# EAGLE board BMS Adapter Segment rev1 (EAGLE 8.1.0)
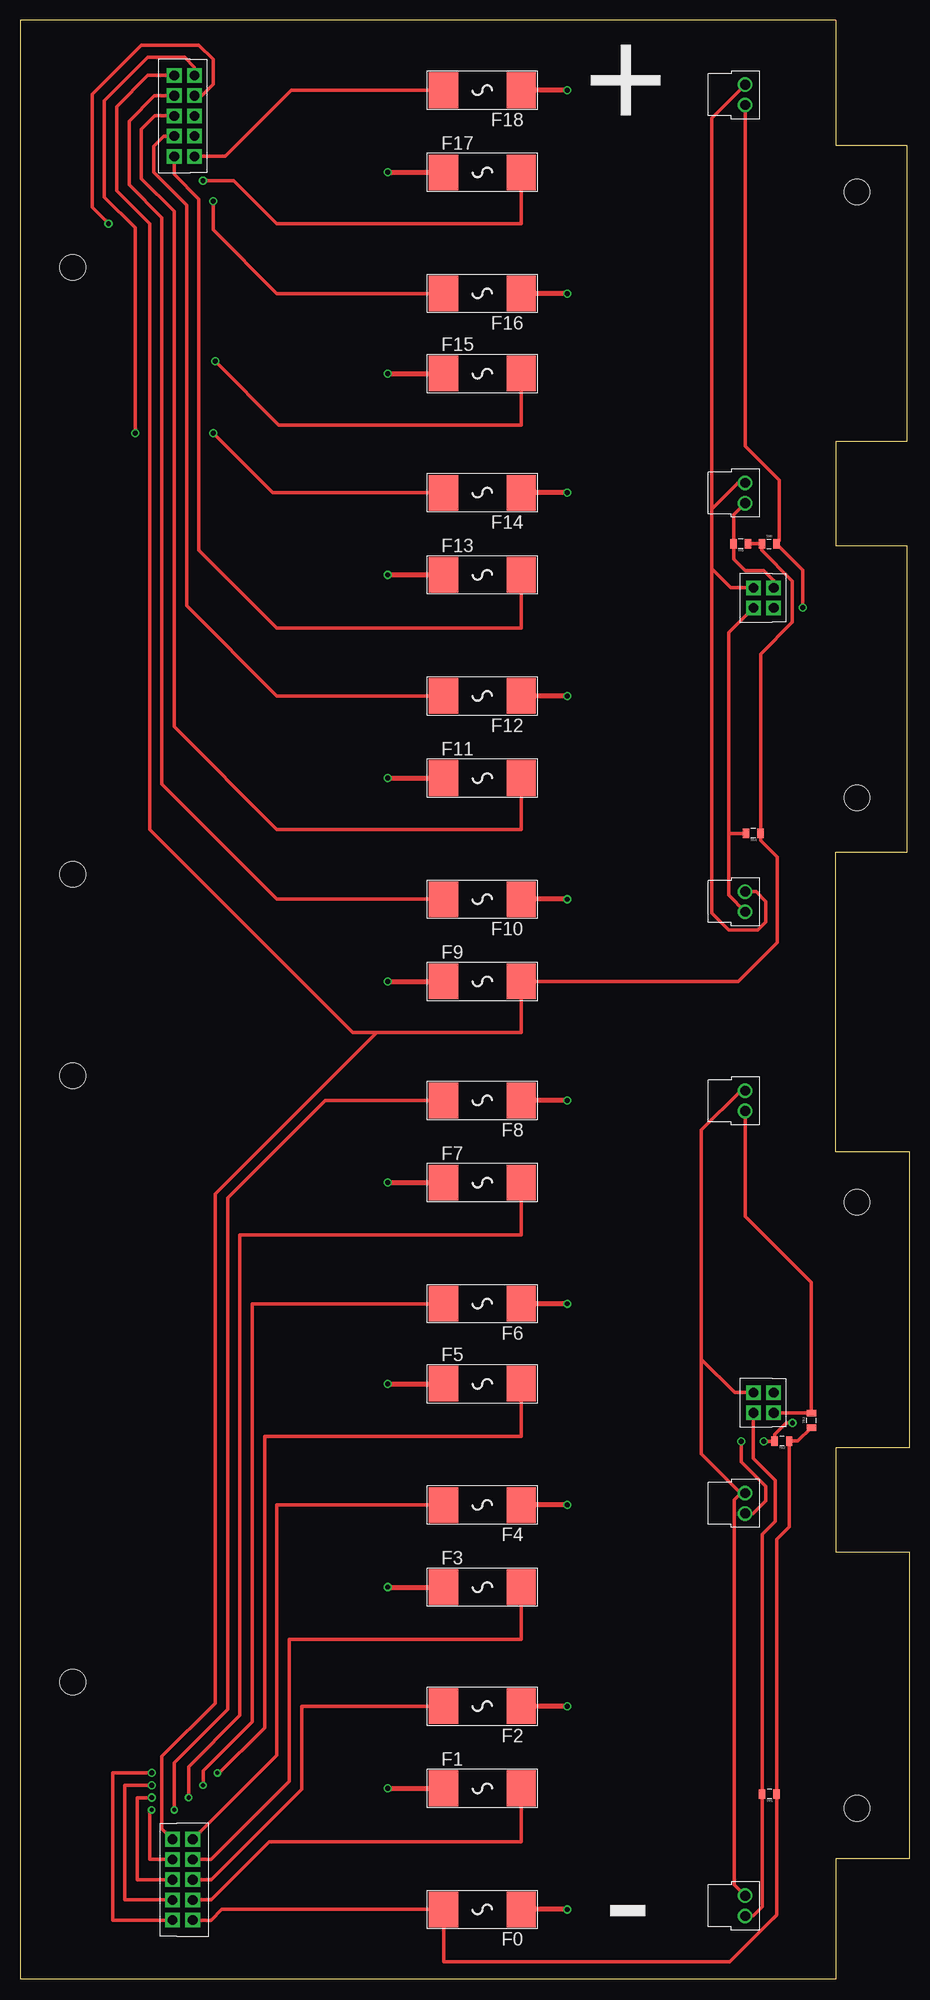
[diagram p0: board, top side]
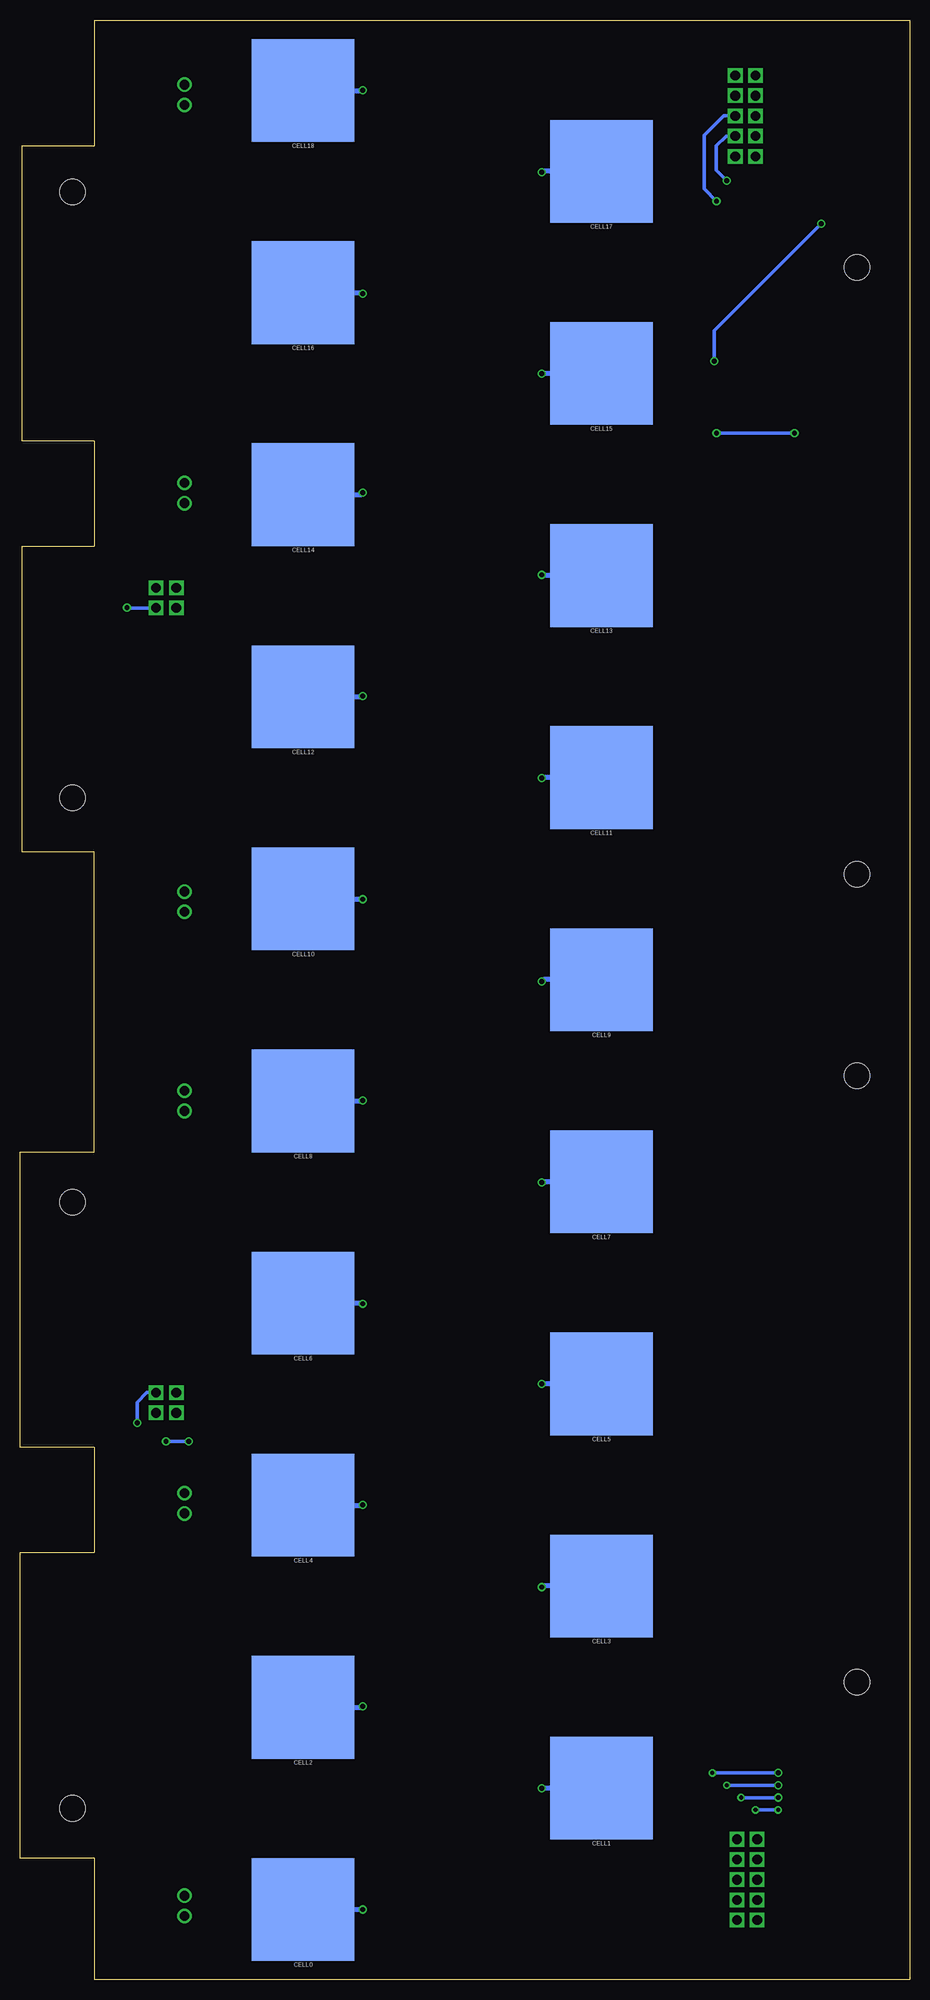
[diagram p1: board, bottom side, seen from below]

Size 109.98 x 242.34 mm. Coordinates in mm from the lower left corner, seen from the top.
Outline: 0,242.34 0,0 100.84,0 100.84,14.99 109.98,14.99 109.98,52.83 100.84,52.83 100.84,65.79 109.98,65.79 109.98,102.36 100.84,102.36 100.84,139.45 109.73,139.45 109.73,177.29 100.84,177.29 100.84,190.25 109.73,190.25 109.73,226.82 100.84,226.82 100.84,242.34 0,242.34
Copper layers (1*16): Top 0.035mm / dielectric 1.5mm / Bottom 0.035mm
Design rules "default": minimum track width 10mil, minimum drill 24mil, track to track 8mil, track to pad 8mil, pad to pad 8mil, via to via 8mil, smd to smd 8mil, copper to edge 40mil, drill to drill 8mil, minimum pad ring 10mil, minimum via ring 8mil, stop-mask expansion 4mil, vias tented up to drill 0mil, thermal gap 10mil
Holes 3.2 mm at 6.5,36.77 6.5,111.77 103.5,96.14 103.5,21.14 6.5,136.71 6.49,211.77 103.5,146.14 103.5,221.11

## Footprints (pad centres in the part's own frame; a part is rotated, then mirrored left to right if it is on the bottom)
KEYSTONE5222 = smd 12.7 x 12.7: P$1 0,0
OMF_250 = smd 3.6 x 4.4: P$1 -4.8,0; P$2 4.8,0
0805 = smd 0.8 x 1.2: 1 -0.9,0; 2 0.9,0
NANO-FIT_VERTICAL-10 = drill 1.2 square: P$1 -5,0; P$2 -2.5,0; P$3 0,0; P$4 2.5,0; P$5 5,0; P$6 -5,2.5; P$7 -2.5,2.5; P$8 0,2.5; P$9 2.5,2.5; P$10 5,2.5
NANO-FIT_VERTICAL-4 = drill 1.2 square: P$1 -1.25,0; P$2 1.25,0; P$3 -1.25,2.5; P$4 1.25,2.5
NANO-FIT_VERTICAL-2 = drill 1.2: P$1 -1.25,0; P$2 1.25,0

## Placement (x,y rotation side)
CELL0  [KEYSTONE5222]  75,8.64 0 bottom
CELL1  [KEYSTONE5222]  38.1,23.65 0 bottom
CELL2  [KEYSTONE5222]  75,33.64 0 bottom
CELL3  [KEYSTONE5222]  38.1,48.65 0 bottom
CELL4  [KEYSTONE5222]  75,58.64 0 bottom
CELL5  [KEYSTONE5222]  38.1,73.65 0 bottom
CELL6  [KEYSTONE5222]  75,83.64 0 bottom
CELL7  [KEYSTONE5222]  38.1,98.65 0 bottom
CELL8  [KEYSTONE5222]  75,108.64 0 bottom
CELL9  [KEYSTONE5222]  38.1,123.65 0 bottom
CELL10  [KEYSTONE5222]  75,133.64 0 bottom
CELL11  [KEYSTONE5222]  38.1,148.65 0 bottom
CELL12  [KEYSTONE5222]  75,158.64 0 bottom
CELL13  [KEYSTONE5222]  38.1,173.65 0 bottom
CELL14  [KEYSTONE5222]  75,183.64 0 bottom
CELL15  [KEYSTONE5222]  38.1,198.65 0 bottom
CELL16  [KEYSTONE5222]  75,208.64 0 bottom
CELL17  [KEYSTONE5222]  38.1,223.65 0 bottom
CELL18  [KEYSTONE5222]  75,233.64 0 bottom
F0  [OMF_250]  57.15,8.64 180 top
F1  [OMF_250]  57.15,23.62 0 top
F2  [OMF_250]  57.15,33.78 180 top
F3  [OMF_250]  57.15,48.51 0 top
F4  [OMF_250]  57.15,58.67 180 top
F5  [OMF_250]  57.15,73.66 0 top
F6  [OMF_250]  57.15,83.57 180 top
F7  [OMF_250]  57.15,98.55 0 top
F8  [OMF_250]  57.15,108.71 180 top
F9  [OMF_250]  57.15,123.44 0 top
F10  [OMF_250]  57.15,133.6 180 top
F11  [OMF_250]  57.15,148.59 0 top
F12  [OMF_250]  57.15,158.75 180 top
F13  [OMF_250]  57.15,173.74 0 top
F14  [OMF_250]  57.15,183.9 180 top
F15  [OMF_250]  57.15,198.63 0 top
F16  [OMF_250]  57.15,208.53 180 top
F17  [OMF_250]  57.15,223.52 0 top
F18  [OMF_250]  57.15,233.68 180 top
TR1  10kΩ  [0805]  92.66,22.91 180 top
TR2  10kΩ  [0805]  94.21,66.57 180 top
TR3  10kΩ  [0805]  97.84,69.14 90 top
TR4  10kΩ  [0805]  90.65,141.76 180 top
TR5  10kΩ  [0805]  89.13,177.57 180 top
TR6  10kΩ  [0805]  92.61,177.57 0 top
X1  CONNECTOR-10NANO-FIT_VERTICAL-10  [NANO-FIT_VERTICAL-10]  19.05,230.5 270 top
X5  CONNECTOR-4NANO-FIT-VERTICAL-4  [NANO-FIT_VERTICAL-4]  90.68,170.89 270 top
X6  CONNECTOR-4NANO-FIT-VERTICAL-4  [NANO-FIT_VERTICAL-4]  90.68,71.32 270 top
X7  CONNECTOR-2NANO-FIT_VERTICAL-2  [NANO-FIT_VERTICAL-2]  89.66,9.09 270 top
X8  CONNECTOR-2NANO-FIT_VERTICAL-2  [NANO-FIT_VERTICAL-2]  89.66,58.88 270 top
X9  CONNECTOR-2NANO-FIT_VERTICAL-2  [NANO-FIT_VERTICAL-2]  89.66,108.66 270 top
X10  CONNECTOR-2NANO-FIT_VERTICAL-2  [NANO-FIT_VERTICAL-2]  89.66,133.3 270 top
X11  CONNECTOR-2NANO-FIT_VERTICAL-2  [NANO-FIT_VERTICAL-2]  89.66,183.85 270 top
X12  CONNECTOR-2NANO-FIT_VERTICAL-2  [NANO-FIT_VERTICAL-2]  89.66,233.12 270 top
X13  CONNECTOR-10NANO-FIT_VERTICAL-10  [NANO-FIT_VERTICAL-10]  21.34,12.32 90 top

## Library data of the parts
CELL0 CELL1-CELL18 F0 F1-F18 TR1-TR6 X1 X5-X13 = HyTechDevices

## Nets
CC0: CELL0.P$1 F0.P$1
CC1: CELL1.P$1 F1.P$1
CC2: CELL2.P$1 F2.P$1
CC3: CELL3.P$1 F3.P$1
CC4: CELL4.P$1 F4.P$1
CC5: CELL5.P$1 F5.P$1
CC6: CELL6.P$1 F6.P$1
CC7: CELL7.P$1 F7.P$1
CC8: CELL8.P$1 F8.P$1
CC9: CELL9.P$1 F9.P$1
CC10: CELL10.P$1 F10.P$1
CC11: CELL11.P$1 F11.P$1
CC12: CELL12.P$1 F12.P$1
CC13: CELL13.P$1 F13.P$1
CC14: CELL14.P$1 F14.P$1
CC15: CELL15.P$1 F15.P$1
CC16: CELL16.P$1 F16.P$1
CC17: CELL17.P$1 F17.P$1
CC18: CELL18.P$1 F18.P$1
SENSE0: F0.P$2 TR1.1 TR2.1 TR3.1 X13.P$1
SENSE1: F1.P$2 X13.P$2
SENSE2: F2.P$2 X13.P$3
SENSE3: F3.P$2 X13.P$4
SENSE4: F4.P$2 X13.P$5
SENSE5: F5.P$2 X13.P$6
SENSE6: F6.P$2 X13.P$7
SENSE7: F7.P$2 X13.P$8
SENSE8: F8.P$2 X13.P$9
SENSE9: F9.P$2 TR4.1 TR5.1 TR6.1 X1.P$1 X13.P$10
SENSE10: F10.P$2 X1.P$2
SENSE11: F11.P$2 X1.P$3
SENSE12: F12.P$2 X1.P$4
SENSE13: F13.P$2 X1.P$5
SENSE14: F14.P$2 X1.P$6
SENSE15: F15.P$2 X1.P$7
SENSE16: F16.P$2 X1.P$8
SENSE17: F17.P$2 X1.P$9
SENSE18: F18.P$2 X1.P$10
THERM1: TR1.2 X6.P$2 X7.P$2
THERM2: TR2.2 X6.P$3 X8.P$2
THERM3: TR3.2 X6.P$4 X9.P$2
THERM4: TR4.2 X5.P$2 X10.P$2
THERM5: TR5.2 X5.P$3 X11.P$2
THERM6: TR6.2 X5.P$4 X12.P$2
THERM_POWER_1: X6.P$1 X7.P$1 X8.P$1 X9.P$1
THERM_POWER_2: X5.P$1 X10.P$1 X11.P$1 X12.P$1

## Tracks (layer width: path | path; a pad name or v marks a point on that pad's centre or on a via)
CC0  (via drill 0.6)
  Top 0.61: v67.64,8.64 F0.P$1
  Bottom 0.61: CELL0.P$1 v67.65,8.64 v67.64,8.64
CC1  (via drill 0.6)
  Top 0.61: v45.47,23.62 F1.P$1
  Bottom 0.61: CELL1.P$1 45.44,23.65 v45.47,23.62
CC2  (via drill 0.6)
  Top 0.61: v67.64,33.78 F2.P$1
  Bottom 0.61: CELL2.P$1 67.78,33.64 v67.64,33.78
CC3  (via drill 0.6)
  Top 0.61: v45.47,48.51 F3.P$1
  Bottom 0.61: CELL3.P$1 45.33,48.65 v45.47,48.51
CC4  (via drill 0.6)
  Top 0.61: v67.64,58.67 F4.P$1
  Bottom 0.61: CELL4.P$1 67.67,58.64 v67.64,58.67
CC5  (via drill 0.6)
  Top 0.61: v45.47,73.66 F5.P$1
  Bottom 0.61: CELL5.P$1 45.45,73.65 v45.47,73.66
CC6  (via drill 0.6)
  Top 0.61: v67.64,83.57 F6.P$1
  Bottom 0.61: CELL6.P$1 67.72,83.64 v67.64,83.57
CC7  (via drill 0.6)
  Top 0.61: v45.47,98.55 F7.P$1
  Bottom 0.61: CELL7.P$1 45.37,98.65 v45.47,98.55
CC8  (via drill 0.6)
  Top 0.61: v67.64,108.71 F8.P$1
  Bottom 0.61: CELL8.P$1 67.71,108.64 v67.64,108.71
CC9  (via drill 0.6)
  Top 0.61: v45.47,123.44 F9.P$1
  Bottom 0.61: CELL9.P$1 45.26,123.65 v45.47,123.44
CC10  (via drill 0.6)
  Top 0.61: v67.64,133.6 F10.P$1
  Bottom 0.61: CELL10.P$1 67.68,133.64 v67.64,133.6
CC11  (via drill 0.6)
  Top 0.61: v45.47,148.59 F11.P$1
  Bottom 0.61: CELL11.P$1 45.41,148.65 v45.47,148.59
CC12  (via drill 0.6)
  Top 0.61: v67.64,158.75 F12.P$1
  Bottom 0.61: CELL12.P$1 67.75,158.64 v67.64,158.75
CC13  (via drill 0.6)
  Top 0.61: v45.47,173.74 F13.P$1
  Bottom 0.61: CELL13.P$1 45.38,173.65 v45.47,173.74
CC14  (via drill 0.6)
  Top 0.61: v67.64,183.9 F14.P$1
  Bottom 0.61: CELL14.P$1 67.89,183.64 v67.64,183.9
CC15  (via drill 0.6)
  Top 0.61: v45.47,198.63 F15.P$1
  Bottom 0.61: CELL15.P$1 45.45,198.65 v45.47,198.63
CC16  (via drill 0.6)
  Top 0.61: v67.64,208.53 F16.P$1
  Bottom 0.61: CELL16.P$1 67.75,208.64 v67.64,208.53
CC17  (via drill 0.6)
  Top 0.61: v45.47,223.52 F17.P$1
  Bottom 0.61: CELL17.P$1 45.34,223.65 v45.47,223.52
CC18  (via drill 0.6)
  Top 0.61: v67.64,233.68 F18.P$1
  Bottom 0.61: CELL18.P$1 67.68,233.64 v67.64,233.68
SENSE0
  Top 0.406: X13.P$1 23.62,7.32 24.94,8.64 F0.P$2 52.35,2.16 87.76,2.16 92.58,6.99 | 92.58,6.99 93.47,7.87 | TR3.1 96.17,66.57 TR2.1 95.11,55.99 93.56,54.44 TR1.1 93.56,7.96 92.58,6.99
SENSE1
  Top 0.406: X13.P$2 23.62,9.82 30.82,17.02 61.95,17.02 F1.P$2
SENSE2
  Top 0.406: X13.P$3 23.62,12.32 34.8,23.5 34.8,32 | 34.8,32 34.8,33.62 | F2.P$2 34.8,33.78 34.8,32
SENSE3
  Top 0.406: X13.P$4 21.38,14.86 23.62,14.86 33.27,24.51 33.27,42.04 54.36,42.04 54.79,42.04 61.95,42.04 F3.P$2
SENSE4
  Top 0.406: F4.P$2 31.75,58.67 31.75,27.73 X13.P$5
SENSE5  (via drill 0.5, 0.6)
  Top 0.406: X13.P$6 11.43,7.32 11.43,25.53 v16.26,25.53 | v24.38,25.53 24.63,25.53 29.85,30.75 30.23,31.11 30.23,67.18 61.95,67.18 F5.P$2
  Bottom 0.406: v24.38,25.53 v16.26,25.53
SENSE6  (via drill 0.5, 0.6)
  Top 0.406: v22.61,24 22.61,25.78 28.7,31.88 28.7,83.57 F6.P$2 | X13.P$7 12.95,9.82 12.95,24 v16.26,24
  Bottom 0.406: v22.61,24 v16.26,24
SENSE7  (via drill 0.5, 0.6)
  Top 0.406: v20.83,22.48 20.83,26.29 27.18,32.64 27.18,92.08 61.95,92.08 F7.P$2 | X13.P$8 14.48,12.32 14.48,22.48 v16.26,22.48
  Bottom 0.406: v20.83,22.48 v16.26,22.48
SENSE8  (via drill 0.5)
  Top 0.406: X13.P$9 16,14.82 16,20.95 v16.26,20.95 | v19.05,20.95 19.05,26.8 25.65,33.4 25.65,96.65 36.77,107.76 37.62,108.61 37.72,108.71 F8.P$2
  Bottom 0.406: v16.26,20.95 v19.05,20.95
SENSE9
  Top 0.406: X13.P$10 17.53,18.63 17.53,27.56 24.13,34.16 24.13,97.16 44.07,117.09 | 44.07,117.09 61.95,117.09 F9.P$2 88.8,123.44 93.62,128.27 93.62,138.81 91.55,140.88 TR4.1 91.55,163.94 95.5,167.89 95.5,172.97 91.71,176.77 TR6.1 TR5.1 | X1.P$1 15.79,235.5 11.94,231.65 11.94,221.23 16,217.17 16,142.24 41.15,117.09 44.07,117.09
SENSE10
  Top 0.406: X1.P$2 16.6,233 13.46,229.87 13.46,222 17.53,217.93 17.53,147.83 31.75,133.6 F10.P$2
SENSE11
  Top 0.406: F11.P$2 61.95,142.24 31.75,142.24 19.05,154.94 19.05,218.69 14.99,222.76 14.99,228.85 16.64,230.5 X1.P$3
SENSE12
  Top 0.406: X1.P$4 17.78,228 16.51,226.74 16.51,223.52 20.57,219.46 20.57,169.93 31.75,158.75 F12.P$2
SENSE13
  Top 0.406: F13.P$2 61.95,167.13 31.75,167.13 22.1,176.78 22.1,220.22 19.05,223.27 X1.P$5
SENSE14  (via drill 0.6)
  Top 0.406: X1.P$6 21.55,236.51 20.32,237.74 15.75,237.74 10.41,232.41 10.41,220.47 14.22,216.66 v14.22,191.26 | v23.88,191.26 31.24,183.9 F14.P$2
  Bottom 0.406: v23.88,191.26 v14.22,191.26
SENSE15  (via drill 0.6)
  Top 0.406: F15.P$2 61.95,192.28 32,192.28 v24.13,200.15 | X1.P$7 22.44,233 23.88,234.44 23.88,237.49 22.1,239.27 14.99,239.27 8.89,233.17 8.89,219.2 v10.92,217.17
  Bottom 0.406: v24.13,200.15 24.13,203.96 v10.92,217.17
SENSE16  (via drill 0.6)
  Top 0.406: F16.P$2 31.75,208.53 23.88,216.41 v23.88,219.96
  Bottom 0.406: v23.88,219.96 25.4,221.49 25.4,228.09 22.99,230.5 X1.P$8
SENSE17  (via drill 0.6)
  Top 0.406: F17.P$2 61.95,217.17 31.75,217.17 26.42,222.5 v22.61,222.5
  Bottom 0.406: v22.61,222.5 23.88,223.77 23.88,226.82 22.69,228 X1.P$9
SENSE18
  Top 0.406: X1.P$10 25.35,225.5 33.53,233.68 F18.P$2
THERM1
  Top 0.406: X7.P$2 90.65,7.84 91.76,8.96 TR1.2 91.76,55.03 93.37,56.64 93.37,61.72 90.68,64.41 X6.P$2
THERM2  (via drill 0.6)
  Top 0.406: X8.P$2 90.65,57.63 92.2,59.18 92.2,60.96 89.15,64.01 v89.15,66.55 | v91.95,66.55 93.28,66.55 TR2.2 93.31,67.4 94.74,68.83 v95.5,68.83
  Bottom 0.406: v89.15,66.55 v91.95,66.55 | v95.5,68.83 95.5,71.37 94.31,72.57 X6.P$3
THERM3
  Top 0.406: X6.P$4 97.81,70.07 TR3.2 97.84,86.21 89.66,94.39 X9.P$2
THERM4
  Top 0.406: 87.63,141.73 87.63,134.11 89.69,132.05 X10.P$2 | TR4.2 89.73,141.73 87.63,141.73 | X5.P$2 87.63,166.59 87.63,141.73
THERM5
  Top 0.406: X5.P$3 93.18,173.01 91.95,174.24 89.66,174.24 88.23,175.68 TR5.2 88.23,181.16 X11.P$2
THERM6  (via drill 0.6)
  Top 0.406: v96.77,169.67 96.77,174.31 TR6.2 93.88,177.94 93.88,185.42 89.66,189.64 X12.P$2
  Bottom 0.406: v96.77,169.67 96.74,169.64 X5.P$4
THERM_POWER_1
  Top 0.406: 84.23,76.71 84.23,65.02 89.12,60.13 | 84.23,76.71 84.23,105.05 89.08,109.91 X9.P$1 | X6.P$1 88.36,72.57 84.23,76.71 | X8.P$1 89.12,60.13 | 89.12,60.13 88.29,59.29 88.29,11.71 X7.P$1
THERM_POWER_2
  Top 0.406: X10.P$1 91,134.55 92.2,133.35 92.2,130.81 91.19,129.79 87.63,129.79 85.5,131.93 85.5,174.5 | 85.5,181.86 85.5,174.5 | X5.P$1 87.85,172.14 85.5,174.5 | X11.P$1 88.73,185.09 85.5,181.86 | X12.P$1 85.5,230.21 85.5,181.86

## Text on the board
tPlace: + | -
tDocu: DANGER HIGH VOLTAGE | DANGER HIGH VOLTAGE | TRACTIVE SYSTEM VOLTAGE | DANGER HIGH VOLTAGE | DANGER HIGH VOLTAGE | DANGER HIGH VOLTAGE | DANGER HIGH VOLTAGE | DANGER HIGH VOLTAGE | DANGER HIGH VOLTAGE | DANGER HIGH VOLTAGE | hytech_2017_bms_layout_rev1
bDocu: DANGER HIGH VOLTAGE